# Altium PCB ov_ftdi.PcbDoc (part 3 of 3)
Units mm, origin at the board's own origin, x right, y up, seen from the top; angles counter-clockwise.
Board outline 70.64 x 125.22 mm, 4 copper layers (Top Layer, Ground, Power, Bottom Layer), stack 1.565 mm thick; 150 components, 161 nets, 670 pads, 245 vias.
Unrouted connection lines stored in the file: 2.
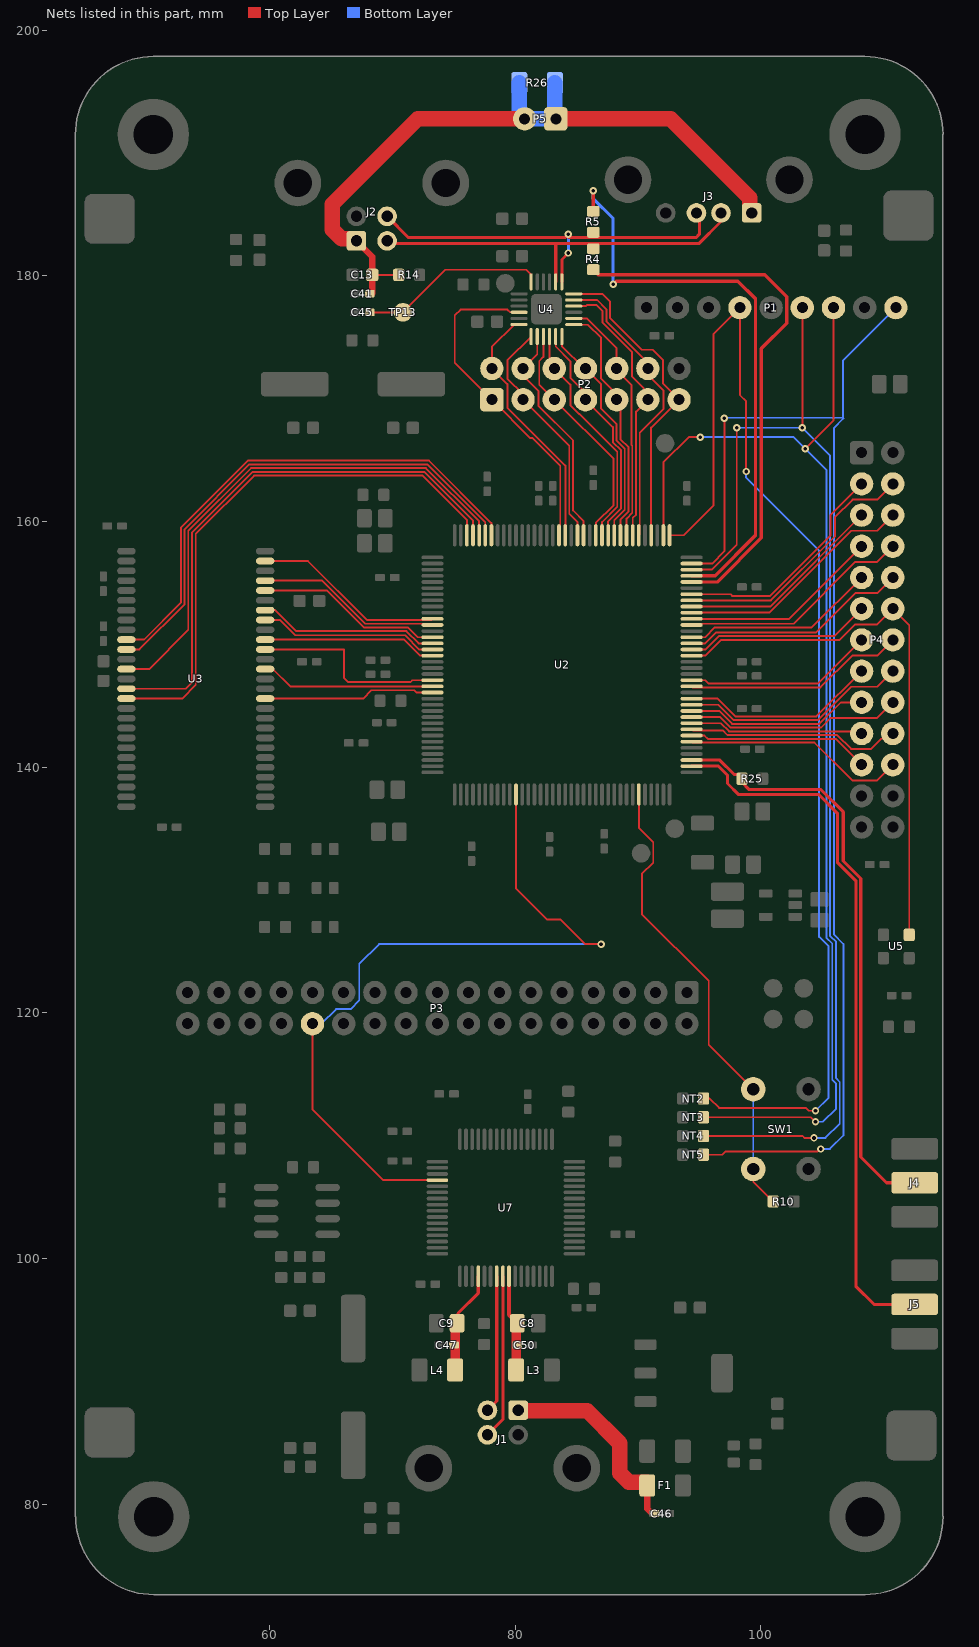
[diagram p5: the nets of this part, all layers, seen from the top]

## Via types
v1: diameter 0.6, hole 0.3, Top Layer to Bottom Layer, 245 vias

## Nets (pads, with @x,y where several pads share a name; then routed paths per layer and width w, separated by ;. In a path a pad name is that pad's centre, name@x,y a point inside that pad or via, vN(x,y) a via of type N, cw(c..) or ccw(c..) an arc to the next point about the centre after c; other vN are vias at no path point) (continued)
RAM_D5: U2.138 U3.10 | length 42.4
  Top Layer w0.152: U3.10@48.35,150.393 49.784,150.393 52.781,153.39 52.781,159.502 58.243,164.963 72.985,164.963 78.07,159.878 U2.138@78.07,158.886
RAM_D6: U2.139 U3.11 | length 42.1
  Top Layer w0.152: U3.11@48.35,149.593 49.415,149.593 53.086,153.264 53.086,159.375 58.369,164.658 72.859,164.658 77.57,159.947 U2.139@77.57,158.886
RAM_D7: U2.140 U3.13 | length 43.1
  Top Layer w0.152: U3.13@48.35,147.993 50.203,147.993 53.391,151.181 53.391,159.249 58.495,164.353 72.732,164.353 77.07,160.016 U2.140@77.07,158.886
RAM_D8: U2.22 U3.42 | length 14.2
  Top Layer w0.152: U3.42@59.65,147.993 60.287,147.993 61.694,146.586 U2.22@73.27,146.586
RAM_D9: U2.21 U3.44 | length 16.1
  Top Layer w0.152: U3.44@59.65,149.593 66.053,149.593 66.053,147.307 66.421,146.939 71.481,146.939 71.628,147.086 U2.21@73.27,147.086
RAM_D10: U2.17 U3.45 | length 14.2
  Top Layer w0.152: U3.45@59.65,150.393 70.968,150.393 72.275,149.086 U2.17@73.27,149.086
RAM_D11: U2.16 U3.47 | length 14.6
  Top Layer w0.152: U3.47@59.65,151.993 60.834,151.993 62.078,150.749 71.043,150.749 72.206,149.586 U2.16@73.27,149.586
RAM_D12: U2.15 U3.48 | length 14.7
  Top Layer w0.152: U3.48@59.65,152.793 60.465,152.793 62.179,151.079 71.144,151.079 72.137,150.086 U2.15@73.27,150.086
RAM_D13: U2.14 U3.50 | length 15.2
  Top Layer w0.152: U3.50@59.65,154.393 64.663,154.393 67.672,151.384 71.27,151.384 72.068,150.586 U2.14@73.27,150.586
RAM_D14: U2.12 U3.51 | length 15.1
  Top Layer w0.152: U3.51@59.65,155.193 64.294,155.193 67.798,151.689 73.167,151.689 U2.12@73.27,151.586
RAM_D15: U2.11 U3.53 | length 15.6
  Top Layer w0.152: U3.53@59.65,156.793 63.125,156.793 67.924,151.994 73.178,151.994 U2.11@73.27,152.086
RAM_DQMH: U2.23 U3.39 | length 14
  Top Layer w0.152: U3.39@59.65,145.593 67.615,145.593 68.293,146.271 71.788,146.271 71.973,146.086 U2.23@73.27,146.086
RAM_DQML: U2.141 U3.15 | length 45.5
  Top Layer w0.152: U3.15@48.35,146.393 53.175,146.393 53.696,146.914 53.696,159.123 58.621,164.049 72.606,164.049 76.57,160.085 U2.141@76.57,158.886
RAM_WE#: U2.142 U3.16 | length 45.2
  Top Layer w0.152: U3.16@48.35,145.593 52.883,145.593 54,146.71 54,158.997 58.748,163.744 72.48,163.744 76.07,160.154 U2.142@76.07,158.886
RDWR_B: P3.26 U2.47 U7.52 | length 63.6
  Top Layer w0.152: P3.26@63.5,119.126 63.5,112.168 69.278,106.39 U7.52@73.673,106.39 ; U2.47@80.07,137.786 80.07,130.115 82.575,127.61 83.688,127.61 85.694,125.603 v1@86.868,125.603
  Bottom Layer w0.152: P3.26@63.5,119.126 64.225,119.126 65.418,120.319 66.598,120.319 67.31,121.031 67.31,123.989 68.924,125.603 v1@86.868,125.603
  other v1: 86.995,125.603
SPARE0: P4.3 U2.102 | length 18.6
  Top Layer w0.152: U2.102@94.37,154.086 97.537,154.086 97.665,153.957 100.764,153.957 105.664,158.857 105.664,160.528 P4.3@108.204,163.068
SPARE1: P4.4 U2.101 | length 21.2
  Top Layer w0.152: U2.101@94.37,153.586 100.824,153.586 106.025,158.787 106.025,160.35 107.473,161.798 109.474,161.798 P4.4@110.744,163.068
SPARE2: P4.5 U2.100 | length 16.9
  Top Layer w0.152: U2.100@94.37,153.086 100.755,153.086 108.197,160.528 P4.5@108.204,160.528
SPARE3: P4.6 U2.99 | length 19.7
  Top Layer w0.152: U2.99@94.37,152.586 100.686,152.586 107.358,159.258 109.474,159.258 P4.6@110.744,160.528
SPARE4: P4.7 U2.98 | length 16.3
  Top Layer w0.152: U2.98@94.37,152.086 102.302,152.086 P4.7@108.204,157.988
SPARE5: P4.8 U2.97 | length 19
  Top Layer w0.152: U2.97@94.37,151.586 94.473,151.689 102.667,151.689 107.696,156.718 109.474,156.718 P4.8@110.744,157.988
SPARE6: P4.9 U2.95 | length 15.8
  Top Layer w0.152: U2.95@94.37,150.586 95.468,150.586 96.266,151.384 104.14,151.384 P4.9@108.204,155.448
SPARE7: P4.10 U2.94 | length 18.6
  Top Layer w0.152: U2.94@94.37,150.086 95.476,150.086 96.368,150.978 104.496,150.978 107.696,154.178 109.474,154.178 P4.10@110.744,155.448
SPARE8: P4.11 U2.93 | length 15.2
  Top Layer w0.152: U2.93@94.37,149.586 95.484,149.586 96.571,150.673 105.969,150.673 P4.11@108.204,152.908
SPARE9: P4.12 U2.92 U5.3 | length 45.1
  Top Layer w0.152: U2.92@94.37,149.086 95.492,149.086 96.774,150.368 106.426,150.368 107.696,151.638 109.474,151.638 P4.12@110.744,152.908 112.082,151.57 U5.3@112.082,126.36
SPARE10: P4.13 U2.88 | length 15.4
  Top Layer w0.152: U2.88@94.37,147.086 95.484,147.086 95.758,146.812 104.648,146.812 P4.13@108.204,150.368
SPARE11: P4.14 U2.87 | length 18
  Top Layer w0.152: U2.87@94.37,146.586 94.449,146.507 104.851,146.507 107.442,149.098 109.474,149.098 P4.14@110.744,150.368
SPARE12: P4.15 U2.85 | length 16
  Top Layer w0.152: U2.85@94.37,145.586 96.476,145.586 97.917,144.145 104.521,144.145 P4.15@108.204,147.828
SPARE13: P4.16 U2.84 | length 18.5
  Top Layer w0.152: U2.84@94.37,145.086 96.545,145.086 97.791,143.84 104.647,143.84 107.365,146.558 109.474,146.558 P4.16@110.744,147.828
SPARE14: P4.17 U2.83 | length 15
  Top Layer w0.152: U2.83@94.37,144.586 96.614,144.586 97.664,143.535 104.774,143.535 106.526,145.288 P4.17@108.204,145.288
SPARE15: P4.18 U2.82 | length 17.6
  Top Layer w0.152: U2.82@94.37,144.086 96.683,144.086 97.538,143.231 104.9,143.231 105.669,144 109.456,144 P4.18@110.744,145.288
SPARE16: P4.19 U2.81 | length 14.2
  Top Layer w0.152: U2.81@94.37,143.586 96.752,143.586 97.412,142.926 108.026,142.926 P4.19@108.204,142.748
SPARE17: P4.20 U2.80 | length 17.5
  Top Layer w0.152: U2.80@94.37,143.086 94.454,143.002 96.905,143.002 97.286,142.621 106.222,142.621 107.343,141.5 108.988,141.5 109.809,142.321 109.844,142.321 110.271,142.748 P4.20@110.744,142.748
SPARE18: P4.21 U2.79 | length 14.8
  Top Layer w0.152: U2.79@94.37,142.586 95.412,142.586 95.682,142.316 106.096,142.316 P4.21@108.204,140.208
SPARE19: P4.22 U2.78 | length 18.2
  Top Layer w0.152: U2.78@94.37,142.086 94.445,142.011 104.369,142.011 107.442,138.938 109.474,138.938 P4.22@110.744,140.208
SW1: R10.1 SW1.1 SW1.2 U2.67 | length 38.4
  Top Layer w0.152: U2.67@90.07,137.786 90.07,135.073 91.241,133.903 91.241,132.241 90.322,131.322 90.322,128.053 95.758,122.617 95.758,117.42 SW1.1@99.386,113.792 ; SW1.2@99.386,107.292 99.386,106.266 R10.1@101.004,104.648
  Bottom Layer w0.152: SW1.2@99.386,107.292 SW1.1@99.386,113.792
TARGET1ULPI_CLK: P2.4 U2.123 U4.2 | length 18.7
  Top Layer w0.152: P2.4@80.645,172.466 81.8,173.621 U4.2@81.8,175.067 ; P2.4@80.721,172.466 80.721,171.807 81.894,170.634 81.894,169.439 84.709,166.624 84.709,160.909 85.57,160.048 U2.123@85.57,158.886
TARGET1ULPI_D0: P2.6 U2.120 U4.4 | length 19
  Top Layer w0.152: U4.4@82.8,175.067 82.8,172.851 84.501,171.15 84.501,169.484 85.237,168.747 85.253,168.747 88.316,165.684 88.316,161.208 87.07,159.962 U2.120@87.07,158.886
TARGET1ULPI_D1: P2.7 U2.119 U4.5 | length 18.8
  Top Layer w0.152: U4.5@83.3,175.067 83.3,174.256 84.498,173.058 84.498,171.727 85.391,170.834 85.391,170.26 87.96,167.691 87.96,166.471 88.621,165.81 88.621,161.081 87.57,160.031 U2.119@87.57,158.886
TARGET1ULPI_D2: P2.8 U2.118 U4.6 | length 18.6
  Top Layer w0.152: U4.6@83.8,175.067 83.8,174.277 P2.8@85.611,172.466 ; P2.8@85.725,172.466 86.995,171.196 86.995,169.205 88.265,167.935 88.265,166.597 88.925,165.937 88.925,160.955 88.07,160.1 U2.118@88.07,158.886
TARGET1ULPI_D3: P2.9 U2.117 U4.7 | length 19.9
  Top Layer w0.152: U4.7@84.775,176.022 85.929,176.022 86.995,174.956 86.995,171.627 88.265,170.357 P2.9@88.265,169.926 88.57,169.621 88.57,166.723 89.23,166.063 89.23,160.829 88.57,160.169 U2.117@88.57,158.886
TARGET1ULPI_D4: P2.10 U2.116 U4.8 | length 20.4
  Top Layer w0.152: U4.8@84.775,176.53 85.852,176.53 88.265,174.117 88.265,172.329 89.475,171.119 89.475,166.249 89.535,166.189 89.535,160.703 89.07,160.238 U2.116@89.07,158.886
TARGET1ULPI_D5: P2.11 U2.115 U4.10 | length 22.9
  Top Layer w0.152: U4.10@84.775,177.542 85.746,177.542 85.852,177.648 86.613,177.648 87.122,177.138 87.122,176.199 89.525,173.796 89.525,171.8 90.471,170.854 90.471,170.26 P2.11@90.805,169.926 89.84,168.961 89.84,160.576 89.57,160.307 U2.115@89.57,158.886
TARGET1ULPI_D6: P2.12 U2.114 U4.11 | length 24.1
  Top Layer w0.152: U4.11@84.775,178.042 86.677,178.042 87.427,177.292 87.427,176.325 90.805,172.947 P2.12@90.805,172.466 90.805,171.958 92.075,170.688 92.075,169.164 90.145,167.234 90.145,158.961 U2.114@90.07,158.886
TARGET1ULPI_D7: P2.13 U2.112 U4.12 | length 26
  Top Layer w0.152: U4.12@84.775,178.542 87.088,178.542 87.732,177.899 87.732,176.555 90.297,173.99 91.21,173.99 92.05,173.15 92.05,171.221 P2.13@93.345,169.926 91.07,167.651 U2.112@91.07,158.886
TARGET1ULPI_DIR: P2.3 U2.124 U4.1 | length 19.3
  Top Layer w0.152: U4.1@81.3,175.067 79.375,173.142 79.375,171.627 80.645,170.357 P2.3@80.645,169.926 84.404,166.167 84.404,160.651 85.07,159.985 U2.124@85.07,158.886
TARGET1ULPI_NXT: P2.5 U2.121 U4.3 | length 19.4
  Top Layer w0.152: U4.3@82.3,175.067 82.3,173.41 81.966,173.076 81.966,171.145 P2.5@83.185,169.926 88.011,165.1 88.011,161.334 86.57,159.893 U2.121@86.57,158.886
TARGET1ULPI_RST: P2.1 U2.127 U4.22 | length 27.2
  Top Layer w0.152: P2.1@78.105,169.926 75.082,172.949 75.082,176.783 75.558,177.259 79.373,177.259 79.589,177.042 U4.22@80.325,177.042 ; P2.1@78.168,169.989 78.168,169.862 81.229,166.802 81.417,166.802 83.668,164.551 83.668,158.984 U2.127@83.57,158.886
TARGET1ULPI_STP: P2.2 U2.126 U4.24 | length 20.8
  Top Layer w0.152: U4.24@80.325,176.042 79.913,176.042 78.105,174.234 P2.2@78.105,172.466 79.375,171.196 79.375,169.275 84.091,164.559 U2.126@84.091,158.907
TARGETD_N: J2.2 J3.2 R4.1 U4.14 | length 31.8
  Top Layer w0.254: J2.2@69.576,182.856 69.806,182.626 83.3,182.626 ; U4.14@83.3,179.517 83.3,182.626 ; J3.2@96.758,185.13 96.758,184.432 94.952,182.626 83.3,182.626
TARGETD_P: J2.3 J3.3 R5.1 U4.13 | length 32.3
  Top Layer w0.254: J2.3@69.576,184.856 71.298,183.134 84.074,183.134 v1(84.328,183.388) ; U4.13@83.808,179.529 83.808,181.344 v1(84.328,181.864) ; v1@84.328,183.134 94.742,183.134 94.996,183.388 94.996,184.892 J3.3@94.758,185.13
  Bottom Layer w0.254: v1(84.328,181.864) v1(84.328,183.388)
TARGETDTAP_N: R4.2 U2.104 | length 44.3
  Top Layer w0.229: R4.2@86.36,180.506 R4.2@86.78,180.086 ; 96.412,155.086 96.429,155.103 96.477,155.103
  Top Layer w0.279: R4.2@86.78,180.086 100.33,180.086 102.108,178.308 102.108,176.149 100.051,174.092 100.051,158.677 96.477,155.103 ; U2.104@94.37,155.086 96.412,155.086
TARGETDTAP_P: R5.2 U2.105 | length 48.1
  Top Layer w0.229: v1(87.975,179.324) 88.229,179.578
  Top Layer w0.254: R5.2@86.36,185.254 v1(86.36,186.944)
  Top Layer w0.279: 88.229,179.578 98.124,179.578 99.568,178.134 99.568,158.877 96.277,155.586 U2.105@94.37,155.586
  Bottom Layer w0.254: v1(86.36,186.944) 86.36,186.288 87.975,184.673 v1(87.975,179.324)
TARGETID: C45.1 TP13.1 U4.18 | length 14.7
  Top Layer w0.152: C45.1@68.364,177.038 TP13.1@70.866,177.038 74.328,180.5 80.892,180.5 81.3,180.092 U4.18@81.3,179.929
TARGETVBUS: C13.2 C41.2 J2.1 J3.1 P5.1 P5.2 R14.2 R26.1 R26.2 | length 58.3
  Top Layer w0.152: C13.2@68.364,180.086 R14.2@70.524,180.086
  Top Layer w0.508: J2.1@67.076,182.856 68.364,181.568 C13.2@68.364,180.086 C41.2@68.364,178.562
  Top Layer w1.27: J2.1@67.076,182.856 66.911,183.021 65.869,183.021 65.125,183.765 65.125,185.85 72.061,192.786 P5.2@80.772,192.786 ; P5.1@83.312,192.786 92.664,192.786 99.093,186.357 99.093,185.295 J3.1@99.258,185.13
  Bottom Layer w1.27: R26.1@80.338,195.707 80.338,193.22 P5.2@80.772,192.786 P5.1@83.312,192.786 83.238,192.86 R26.2@83.238,195.707
TCK: NT2.2 P1.4 U2.109 | length 99.9
  Top Layer w0.152: U2.109@92.57,158.886 93.735,158.886 96.139,161.29 96.139,175.26 P1.4@98.298,177.419 98.298,170.307 98.806,169.799 v1(98.806,164.084) ; NT2.2@95.338,113.03 95.846,113.03 96.608,112.268 103.668,112.268 103.901,112.035 v1(104.45,112.035)
  Bottom Layer w0.152: v1(98.806,164.084) 98.806,163.576 104.75,157.632 104.75,126.186 105.512,125.424 105.512,113.096 v1(104.45,112.035)
TDI: NT3.2 P1.7 U2.110 | length 97.3
  Top Layer w0.152: U2.110@92.07,158.886 92.07,164.82 94.128,166.878 v1(95.059,166.878) ; NT3.2@95.338,111.506 104.071,111.506 104.433,111.144 v1(104.456,111.144) ; v1(103.614,165.93) 105.918,168.235 P1.7@105.918,177.419
  Bottom Layer w0.152: v1(95.059,166.878) 102.666,166.878 105.334,164.21 105.334,126.136 105.816,125.653 105.816,114.555 106.121,114.251 106.121,112.217 105.048,111.144 v1(104.456,111.144)
TDO: NT4.2 P1.6 U2.106 | length 98.7
  Top Layer w0.152: U2.106@94.37,156.086 96.015,156.086 98.044,158.115 v1(98.044,167.64) ; NT4.2@95.338,109.982 103.394,109.982 103.551,109.825 v1(104.325,109.825) ; v1(103.378,167.64) P1.6@103.378,177.419
  Bottom Layer w0.152: v1(98.044,167.64) v1(103.378,167.64) 105.639,165.379 105.639,126.262 106.121,125.779 106.121,114.682 106.426,114.377 106.426,110.998 105.253,109.825 v1(104.325,109.825)
TMS: NT5.2 P1.9 U2.107 | length 105.4
  Top Layer w0.152: U2.107@94.37,156.586 96.032,156.586 97.028,157.582 v1(97.028,168.402) ; NT5.2@95.338,108.458 96.862,108.458 97.116,108.712 104.612,108.712 104.828,108.928 v1(104.888,108.928)
  Bottom Layer w0.152: v1(97.028,168.402) 97.079,168.453 106.68,168.453 106.68,173.101 P1.9@110.998,177.419 ; v1(104.888,108.928) 105.626,108.928 106.731,110.033 106.731,125.601 105.943,126.388 105.943,167.615 106.731,168.402
TRIG_IN: J4.1 R25.1 U2.75 | length 48.2
  Top Layer w0.254: U2.75@94.37,140.586 96.664,140.586 97.834,139.416 98.163,139.416 98.464,139.115 98.464,138.757 99.045,138.176 104.902,138.176 106.705,136.373 106.705,132.375 108.14,130.941 108.14,108.268 110.236,106.172 J4.1@112.522,106.172
TRIG_OUT: J5.1 U2.74 | length 58.4
  Top Layer w0.254: U2.74@94.37,140.086 94.39,140.106 96.54,140.106 97.282,139.364 97.282,138.684 98.196,137.77 104.734,137.77 106.233,136.27 106.233,132.273 107.733,130.773 107.733,97.753 109.22,96.266 J5.1@112.522,96.266
USB_N: J1.2 U7.7 | length 11.2
  Top Layer w0.254: J1.2@77.744,87.654 78.498,88.408 U7.7@78.498,98.565
USB_P: J1.3 U7.8 | length 13.4
  Top Layer w0.254: J1.3@77.744,85.654 78.998,86.908 U7.8@78.998,98.565
VPHY: C9.2 C47.2 L4.2 U7.4 | length 9
  Top Layer w0.254: L4.2@75.349,90.932 75.349,90.335 L4.2@75.364,90.32 ; C9.2@75.349,94.742 75.349,95.542 76.998,97.191 U7.4@76.998,98.565
  Top Layer w0.762: L4.2@75.11,90.932 75.11,92.964 75.11,94.58 C9.2@75.272,94.742
VPLL: C8.2 C50.2 L3.2 U7.9 | length 8
  Top Layer w0.305: U7.9@79.498,98.565 79.498,95.42 C8.2@80.176,94.742
  Top Layer w0.762: L3.2@80.084,90.932 80.084,92.964 80.084,94.65 C8.2@80.176,94.742
VUSB: C46.2 F1.1 J1.1 | length 17.1
  Top Layer w0.508: F1.1@90.752,81.534 90.752,79.644 C46.2@91.148,79.248
  Top Layer w1.27: J1.1@80.244,87.654 80.385,87.654 80.409,87.63 85.852,87.63 88.519,84.963 88.519,82.543 89.263,81.799 90.737,81.799 90.752,81.784 F1.1@90.752,81.534
pads on no net: H1.1@50.546,191.516 H2.1@108.483,191.516 H3.1@108.483,78.994 H4.1@50.571,78.994 J1.5 J2.6 J3.5 P1.3 P1.5 P1.8 U3.40 U7.36 U7.60 U8.7

## Polygon pours and split planes (outlines as drawn)
GND on Top Layer "Top ground" (solid, remove dead copper, pour order 7): 44.196,72.644 44.196,197.866 114.554,197.866 114.554,72.644
+1.2V on Top Layer "FPGA VccInt (1.2v)" (solid, remove dead copper, pour order 5): 74.016,158.403 74.196,158.215 96.012,158.215 96.012,135.424 95.729,135.128 74.186,135.128
+1.8V on Top Layer "FTDI Vcc18 (1.8v)" (solid, remove dead copper, pour order 6): 74.168,108.966 84.074,108.966 84.074,99.314 83.82,99.06 74.168,99.06
+3.3V on Top Layer "top 3.3v supply" (solid, remove dead copper, pour order 2): 88.519,88.519 98.806,88.519 98.806,94.996 88.87,94.996 88.519,94.695
NetC1_2 on Top Layer "top c1_2" (solid, remove dead copper, pour order 3): 99.822,129.54 99.314,129.032 98.552,129.032 93.98,129.032 93.98,132.334 93.98,132.588 94.234,132.842 98.298,132.842 98.298,131.318 98.806,130.81 98.806,130.556 99.568,130.556 100.076,130.048
GND on Bottom Layer "bottom ground" (solid, remove dead copper, pour order 8): 44.196,197.612 114.554,197.612 114.554,72.644 44.196,72.644
GND on Ground (split plane): 108.811,197.349 109.137,197.321 109.462,197.275 109.783,197.211 110.1,197.129 110.412,197.03 110.719,196.913 111.018,196.779 111.309,196.629 111.591,196.462 111.863,196.28 112.125,196.083 112.376,195.872 112.614,195.647 112.839,195.409 113.05,195.158 113.247,194.896 113.429,194.624 113.596,194.342 113.746,194.051 113.88,193.752 113.997,193.445 114.096,193.133 114.178,192.816 114.242,192.495 114.288,192.17 114.316,191.844 114.321,191.66 114.307,191.616 114.298,191.516 114.298,79.019 114.307,78.919 114.321,78.873 114.316,78.666 114.288,78.34 114.242,78.015 114.178,77.694 114.096,77.377 113.997,77.065 113.88,76.758 113.746,76.459 113.596,76.168 113.429,75.886 113.247,75.614 113.05,75.352 112.839,75.101 112.614,74.863 112.376,74.638 112.125,74.427 111.863,74.23 111.591,74.048 111.309,73.881 111.018,73.731 110.719,73.597 110.412,73.48 110.1,73.381 109.783,73.299 109.462,73.235 109.137,73.189 108.811,73.161 108.501,73.153 108.483,73.154 50.596,73.154 50.574,73.152 50.571,73.152 50.243,73.161 49.917,73.189 49.592,73.235 49.271,73.299 48.954,73.381 48.642,73.48 48.335,73.597 48.036,73.731 47.745,73.881 47.463,74.048 47.191,74.23 46.929,74.427 46.678,74.638 46.44,74.863 46.215,75.101 46.004,75.352 45.807,75.614 45.625,75.886 45.458,76.168 45.308,76.459 45.174,76.758 45.057,77.065 44.958,77.377 44.876,77.694 44.812,78.015 44.766,78.34 44.738,78.666 44.729,78.994 44.731,78.994 44.722,79.094 44.706,79.144 44.706,191.491 44.704,191.513 44.704,191.516 44.713,191.844 44.741,192.17 44.787,192.495 44.851,192.816 44.933,193.133 45.032,193.445 45.149,193.752 45.283,194.051 45.433,194.342 45.6,194.624 45.782,194.896 45.979,195.158 46.19,195.409 46.415,195.647 46.653,195.872 46.904,196.083 47.166,196.28 47.438,196.462 47.72,196.629 48.011,196.779 48.31,196.913 48.617,197.03 48.929,197.129 49.246,197.211 49.567,197.275 49.892,197.321 50.218,197.349 50.528,197.357 50.546,197.356 108.458,197.356 108.48,197.358 108.483,197.358
+3.3V on Power (split plane): 108.811,197.349 109.137,197.321 109.462,197.275 109.783,197.211 110.1,197.129 110.412,197.03 110.719,196.913 111.018,196.779 111.309,196.629 111.591,196.462 111.863,196.28 112.125,196.083 112.376,195.872 112.614,195.647 112.839,195.409 113.05,195.158 113.247,194.896 113.429,194.624 113.596,194.342 113.746,194.051 113.88,193.752 113.997,193.445 114.096,193.133 114.178,192.816 114.242,192.495 114.288,192.17 114.316,191.844 114.321,191.66 114.307,191.616 114.298,191.516 114.298,79.019 114.307,78.919 114.321,78.873 114.316,78.666 114.288,78.34 114.242,78.015 114.178,77.694 114.096,77.377 113.997,77.065 113.88,76.758 113.746,76.459 113.596,76.168 113.429,75.886 113.247,75.614 113.05,75.352 112.839,75.101 112.614,74.863 112.376,74.638 112.125,74.427 111.863,74.23 111.591,74.048 111.309,73.881 111.018,73.731 110.719,73.597 110.412,73.48 110.1,73.381 109.783,73.299 109.462,73.235 109.137,73.189 108.811,73.161 108.501,73.153 108.483,73.154 50.596,73.154 50.574,73.152 50.571,73.152 50.243,73.161 49.917,73.189 49.592,73.235 49.271,73.299 48.954,73.381 48.642,73.48 48.335,73.597 48.036,73.731 47.745,73.881 47.463,74.048 47.191,74.23 46.929,74.427 46.678,74.638 46.44,74.863 46.215,75.101 46.004,75.352 45.807,75.614 45.625,75.886 45.458,76.168 45.308,76.459 45.174,76.758 45.057,77.065 44.958,77.377 44.876,77.694 44.812,78.015 44.766,78.34 44.738,78.666 44.729,78.994 44.731,78.994 44.722,79.094 44.706,79.144 44.706,191.491 44.704,191.513 44.704,191.516 44.713,191.844 44.741,192.17 44.787,192.495 44.851,192.816 44.933,193.133 45.032,193.445 45.149,193.752 45.283,194.051 45.433,194.342 45.6,194.624 45.782,194.896 45.979,195.158 46.19,195.409 46.415,195.647 46.653,195.872 46.904,196.083 47.166,196.28 47.438,196.462 47.72,196.629 48.011,196.779 48.31,196.913 48.617,197.03 48.929,197.129 49.246,197.211 49.567,197.275 49.892,197.321 50.218,197.349 50.528,197.357 50.546,197.356 108.458,197.356 108.48,197.358 108.483,197.358

## Keep-outs
Keep-Out Layer:
  lines w0.254: 44.196,78.994 44.196,191.491 cw(c50.546,191.516) 50.546,197.866 108.458,197.866 cw(c108.483,191.516) 114.833,191.516 ; 44.221,78.994 ccw(c50.571,78.994) 50.596,72.644 108.483,72.644 ccw(c108.483,78.994) 114.833,79.019 ; 114.808,79.019 114.808,191.516

## Other copper
Top Layer:
  pour cut-out: 54.813,186.461 54.813,196.621 57.353,196.621 57.353,186.461
  pour cut-out: 95.25,128.778 101.473,128.778 101.512,128.817 101.6,128.729 101.6,123.19 95.25,123.19
  pour cut-out: 96.774,130.556 102.997,130.556 103.036,130.595 103.124,130.507 103.124,124.968 96.774,124.968
  region net NetC1_2: 100.965,129.032 94.107,129.032 94.107,132.715 93.98,132.842 98.298,132.842 98.298,131.191 99.06,130.429 100.965,130.429
  text "1" at 56.845,187.223 h2.79 r90
Bottom Layer:
  pour cut-out: 77.47,195.453 85.979,195.453 85.979,187.833 85.852,187.706 77.47,187.706
  pour cut-out: 54.813,186.461 54.813,189.001 57.353,189.001 57.353,186.461
  pour cut-out: 54.856,186.461 54.856,196.621 57.396,196.621 57.396,186.461
  pour cut-out: 95.25,128.778 101.6,128.778 101.6,123.19 95.25,123.19
  text "4" at 56.845,194.843 h2.79 r90
Power (plane layer: these items are gaps in the copper):
  region: 54.864,191.795 57.378,191.795 57.404,191.769 57.404,186.436 54.864,186.436
  region: 54.864,193.777 54.864,196.596 57.404,196.596 57.378,196.57 57.378,193.777
  lines w1.524: 82.042,177.292 83.058,177.292
  text "3" at 56.845,192.303 h2.79 r90
Ground (plane layer: these items are gaps in the copper):
  region: 54.856,190.779 54.856,196.621 57.396,196.621 57.396,190.779
  region: 54.856,186.461 54.856,189.509 57.396,189.509 57.396,186.461
  region: 54.813,193.573 54.813,196.621 57.353,196.621 57.353,193.573
  region: 95.25,128.778 101.6,128.778 101.6,123.19 95.25,123.19
  text "2" at 56.845,189.763 h2.79 r90

## Silkscreen, mask and mechanical layers (free items; w line width, h text height)
Top Overlay:
  lines w0.254: 63.5,123.3 63.5,124.1 ; 70.895,175.418 70.895,175.926 ; 77.4,180.5 78.15,180.5 78.408,180.242 ; 89,104 89,114.554 96.774,114.554 96.774,104 89,104 ; 98,116.5 106.5,116.5 106.5,124.7 98,124.7 98,116.5
  text "to device" at 104,191 h2 r90
  text "target current" at 77.032,189.992 h2
  text "measurement" at 77.1,188.6 h2
  text "to target host" at 59.25,188 h2 r90
  text "d+" at 93.726,182.58 h2
  text "d-" at 96.52,182.58 h2
  text "rbias" at 73.85,180.275 h2
  text "+3.3v" at 91.186,179.07 h2 r90
  text "gnd" at 93.472,179.07 h2 r90
  text "tck" at 98.552,179.07 h2 r90
  text "tdo" at 103.632,179.07 h2 r90
  text "tdi" at 106.172,179.07 h2 r90
  text "tms" at 111.252,179.07 h2 r90
  text "cut links first!" at 104.648,174.498 h2
  text "stp" at 75.7,174.4 h2
  text "targetID" at 69.3,174.3 h2
  text "clk" at 78.105,174.234 h2
  text "d0" at 86,174.1 h2 r90
  text "d2" at 87.4,174.1 h2 r90
  text "d4" at 88.8,174.1 h2 r90
  text "d6" at 90.2,174.1 h2 r90
  text "d7" at 94.045,166.67 h2 r90
  text "d1" at 86.106,166.604 h2 r90
  text "d3" at 88.646,166.599 h2 r90
  text "d5" at 91.186,166.604 h2 r90
  text "rst" at 78.486,166.519 h2 r90
  text "dir" at 81.026,166.398 h2 r90
  text "nxt" at 83.566,166.124 h2 r90
  text "gnd" at 112.372,165.354 h2
  text "gnd" at 104.025,165.227 h2
  text "s0" at 105.055,162.814 h2
  text "s1" at 112.372,162.814 h2
  text "s2" at 105.075,160.274 h2
  text "s3" at 112.372,160.274 h2
  text "s4" at 105.044,157.734 h2
  text "s5" at 112.372,157.734 h2
  text "s7" at 112.372,155.194 h2
  text "s6" at 105.06,154.94 h2
  text "s9" at 112.372,152.654 h2
  text "s8" at 105.06,152.4 h2
  text "s11" at 112.372,150.114 h2
  text "s10" at 104.226,149.86 h2
  text "s12" at 104.246,147.574 h2
  text "s13" at 112.372,147.574 h2
  text "s15" at 112.372,145.034 h2
  text "s14" at 104.215,144.78 h2
  text "s17" at 112.372,142.494 h2
  text "s16" at 104.23,142.24 h2
  text "s18" at 104.23,139.7 h2
  text "s19" at 112.372,139.7 h2
  text "5v" at 112.372,137.414 h2
  text "1v2" at 104.185,137.398 h2
  text "3v3" at 104.14,134.62 h2
  text "3v3" at 112.372,134.62 h2
  text "csi_b" at 61.5,124.79 h2
  text "gnd" at 53.594,123.444 h2 r90
  text "m0" at 56.134,123.444 h2 r90
  text "bc4" at 58.928,123.444 h2 r90
  text "bd6" at 66.548,123.444 h2 r90
  text "bd4" at 68.834,123.444 h2 r90
  text "tdo" at 71.374,123.444 h2 r90
  text "tck" at 73.914,123.444 h2 r90
  text "ac6" at 76.454,123.444 h2 r90
  text "ac4" at 78.994,123.444 h2 r90
  text "ac2" at 81.788,123.444 h2 r90
  text "ac0" at 84.074,123.444 h2 r90
  text "d6" at 86.614,123.444 h2 r90
  text "d2" at 91.694,123.444 h2 r90
  text "d0" at 94.488,123.444 h2 r90
  text "done" at 59.3,123.355 h2
  text "d4" at 89.57,123.25 h2 r90
  text "d5" at 89.154,115.762 h2 r90
  text "d1" at 94.488,115.762 h2 r90
  text "d7" at 86.614,115.753 h2 r90
  text "d3" at 91.694,115.758 h2 r90
  text "tdi" at 74.168,115.589 h2 r90
  text "m1" at 56.134,115.35 h2 r90
  text "ac3" at 81.767,115.332 h2 r90
  text "ac7" at 76.708,115.135 h2 r90
  text "gnd" at 53.594,114.925 h2 r90
  text "bd5" at 69.088,114.926 h2 r90
  text "bd7" at 66.548,114.916 h2 r90
  text "tms" at 71.374,114.852 h2 r90
  text "cclk" at 84.074,114.858 h2 r90
  text "prog" at 61.214,114.353 h2 r90
  text "init_b" at 58.928,113.54 h2 r90
  text "clkout" at 78.994,113.241 h2 r90
  text "rdwr_b" at 63.754,112.542 h2 r90
  text "tck" at 89.85,112.5 h2
  text "tdi" at 89.965,111.049 h2
  text "tdo" at 89.6,109.5 h2
  text "tms" at 89.35,108 h2
  text "cut for" at 91,106 h2
  text "trig in" at 109.22,104.902 h2 r90
  text "ext JTAG" at 90.25,104.5 h2
  text "dat" at 66.3,104.275 h2
  text "clk" at 66.3,102.725 h2
  text "cs" at 66.3,101.5 h2
  text "trig out" at 109.22,94.488 h2 r90
  text "power" at 96.425,82.2 h2 r90
  text "OpenVizsla v3.2" at 85.598,75.946 h3.56
  text "to analysis" at 65.25,75 h2
  text "(c) 2013,2014 bushing" at 88.8,74.3 h2
  text "host" at 67.25,73.5 h2
Bottom Overlay:
  lines w0.254: 76.7,187.6 76.7,194.25 86.875,194.25 86.875,187.6 76.7,187.6
  text "cut trace for" at 85.865,190.625 h2
  text "target current" at 86.461,189.341 h2
  text "measurement" at 86.425,187.955 h2
  text "gnd" at 91.948,186.686 h2 r270
  text "D+" at 94.234,186.686 h2 r270
  text "D-" at 96.52,186.686 h2 r270
  text "Vbus" at 98.806,186.685 h2 r270
  text "gnd" at 65.531,184.404 h2
  text "D+" at 72.64,184.404 h2
  text "Vbus" at 65.532,182.372 h2
  text "D-" at 72.32,182.372 h2
  text "+3.3v" at 90.174,178.82 h2 r270
  text "gnd" at 92.714,178.82 h2 r270
  text "tck" at 97.794,178.82 h2 r270
  text "tdo" at 102.874,178.82 h2 r270
  text "tdi" at 105.414,178.82 h2 r270
  text "tms" at 110.494,178.82 h2 r270
  text "cut links first!" at 112.25,174.5 h2
  text "stp" at 77.724,173.74 h2 r270
  text "clk" at 80.264,173.74 h2 r270
  text "d0" at 82.804,173.74 h2 r270
  text "d2" at 85.344,173.74 h2 r270
  text "d4" at 87.884,173.74 h2 r270
  text "d6" at 90.424,173.74 h2 r270
  text "gnd" at 92.964,173.74 h2 r270
  text "d1" at 85.344,166.862 h2 r270
  text "d3" at 87.884,166.857 h2 r270
  text "d5" at 90.424,166.862 h2 r270
  text "d7" at 92.964,166.853 h2 r270
  text "rst" at 77.724,166.777 h2 r270
  text "dir" at 80.264,166.656 h2 r270
  text "nxt" at 82.804,166.382 h2 r270
  text "gnd" at 106.791,165.354 h2
  text "gnd" at 114.323,165.354 h2
  text "s0" at 106.791,162.814 h2
  text "s1" at 113.262,162.814 h2
  text "s2" at 106.791,160.274 h2
  text "s3" at 113.267,160.274 h2
  text "s4" at 106.791,157.734 h2
  text "s5" at 113.262,157.734 h2
  text "s7" at 113.271,155.194 h2
  text "s6" at 106.791,154.94 h2
  text "s9" at 113.274,152.654 h2
  text "s8" at 106.791,152.4 h2
  text "s10" at 106.791,149.86 h2
  text "s11" at 114.091,149.86 h2
  text "s13" at 114.096,147.574 h2
  text "s12" at 106.791,147.32 h2
  text "s15" at 114.091,145.034 h2
  text "s14" at 106.791,144.78 h2
  text "s17" at 114.101,142.494 h2
  text "s16" at 106.791,142.24 h2
  text "s18" at 106.791,139.7 h2
  text "s19" at 114.103,139.7 h2
  text "5v" at 113.422,137.43 h2
  text "1v2" at 106.791,137.414 h2
  text "3v3" at 106.791,134.62 h2
  text "3v3" at 114.208,134.62 h2
  text "gnd" at 52.836,123.194 h2 r270
  text "m0" at 55.376,123.194 h2 r270
  text "bc4" at 57.916,123.194 h2 r270
  text "done" at 60.456,123.194 h2 r270
  text "csi_b" at 62.996,123.194 h2 r270
  text "bd6" at 65.536,123.194 h2 r270
  text "bd4" at 67.822,123.194 h2 r270
  text "tdi" at 70.362,123.194 h2 r270
  text "tck" at 72.902,123.194 h2 r270
  text "ac6" at 75.696,123.194 h2 r270
  text "ac4" at 78.236,123.194 h2 r270
  text "ac2" at 80.776,123.194 h2 r270
  text "ac0" at 83.316,123.194 h2 r270
  text "d6" at 85.602,123.194 h2 r270
  text "d0" at 93.476,123.194 h2 r270
  text "d2" at 90.975,123.175 h2 r270
  text "d4" at 88.5,123.15 h2 r270
  text "d7" at 85.602,116.003 h2 r270
  text "d5" at 88.142,116.012 h2 r270
  text "d3" at 90.682,116.008 h2 r270
  text "d1" at 93.476,116.012 h2 r270
  text "tdi" at 73.156,115.839 h2 r270
  text "m1" at 55.122,115.6 h2 r270
  text "ac3" at 80.726,115.586 h2 r270
  text "ac7" at 75.696,115.385 h2 r270
  text "gnd" at 52.582,115.175 h2 r270
  text "bd7" at 65.536,115.166 h2 r270
  text "bd5" at 68.076,115.176 h2 r270
  text "tms" at 70.616,115.102 h2 r270
  text "cclk" at 83.316,115.108 h2 r270
  text "prog" at 60.456,114.603 h2 r270
  text "clkout" at 78.204,113.858 h2 r270
  text "init_b" at 57.916,113.79 h2 r270
  text "rdwr_b" at 62.996,112.792 h2 r270
  text "Vusb" at 85.078,87.376 h2
  text "D-" at 76.446,87.126 h2
  text "gnd" at 84.189,85.344 h2
  text "D+" at 76.446,85.094 h2
Top Solder:
  region: 79.629,178.562 81.026,178.562 81.026,176.022 79.629,176.022
  region: 81.28,180.213 83.82,180.213 83.82,178.816 81.28,178.816
  region: 84.074,178.562 85.471,178.562 85.471,176.022 84.074,176.022
  region: 81.28,175.768 83.82,175.768 83.82,174.371 81.28,174.371
  lines w1.524: 48.336,136.881 48.362,157.328 ; 59.614,137.008 59.639,157.455
Mechanical 2:
  lines w0.254: 37.846,78.841 ccw(c50.393,78.841) 50.393,66.294 108.587,66.294 ccw(c108.587,78.865) 121.158,78.865 121.158,191.669 ccw(c108.611,191.669) 108.611,204.216 50.417,204.216 ccw(c50.417,191.645) 37.846,191.645 37.846,78.841
Mechanical 10:
  lines w0.381: 133.733,103.251 144.145,103.251 167.761,103.251 189.599,103.251 206.104,103.251 220.579,103.251 232.514,103.251 ; 133.733,106.299 144.145,106.299 167.761,106.299 189.599,106.299 206.104,106.299 220.579,106.299 232.514,106.299 ; 133.733,109.347 144.145,109.347 167.761,109.347 189.599,109.347 206.104,109.347 220.579,109.347 232.514,109.347 ; 133.733,112.395 144.145,112.395 167.761,112.395 189.599,112.395 206.104,112.395 220.579,112.395 232.514,112.395 ; 133.733,115.443 144.145,115.443 167.761,115.443 189.599,115.443 206.104,115.443 220.579,115.443 232.514,115.443 ; 133.733,118.491 144.145,118.491 167.761,118.491 189.599,118.491 206.104,118.491 220.579,118.491 232.514,118.491 ; 133.733,121.539 144.145,121.539 167.761,121.539 189.599,121.539 206.104,121.539 220.579,121.539 232.514,121.539 ; 133.733,124.587 144.145,124.587 167.761,124.587 189.599,124.587 206.104,124.587 220.579,124.587 232.514,124.587 ; 133.733,127.635 144.145,127.635 167.761,127.635 189.599,127.635 206.104,127.635 220.579,127.635 232.514,127.635 ; 133.733,130.683 144.145,130.683 167.761,130.683 189.599,130.683 206.104,130.683 220.579,130.683 232.514,130.683 ; 133.733,133.731 232.514,133.731 ; 144.145,136.779 144.145,100.203 ; 167.761,136.779 167.761,100.203 ; 189.599,136.779 189.599,100.203 ; 206.104,136.779 206.104,100.203 ; 220.579,136.779 220.579,100.203 ; 144.145,100.203 133.733,100.203 133.733,136.779 232.514,136.779 232.514,100.203 220.579,100.203 ; 144.145,100.203 167.761,100.203 ; 167.761,100.203 189.599,100.203 ; 189.599,100.203 206.104,100.203 ; 206.104,100.203 220.579,100.203
  text "Notes: unless otherwise specified" at 133.655,163.728 h1.52
  text "1. Silkscreen both sides with non-conductive, RoHS compliant ink" at 133.655,159.918 h1.52
  text "not allowed on component pads or vias (color = WHITE)" at 137.465,157.378 h1.52
  text "2. Material: RoHS-compliant FR4, 1 oz copper on all layers" at 133.655,154.838 h1.52
  text "3. Solder mask: RoHS-compliant SMOBC, type LPI (color = BLUE)" at 133.655,152.298 h1.52
  text "4. Finish: ENIG (3u-5u thickness)" at 133.655,149.758 h1.52
  text "5. All hole sizes are after plating" at 133.655,147.218 h1.52
  text "6. Vendor may use tear drops to improve annular rings as long as" at 133.655,144.678 h1.52
  text "DRC rules are followed" at 138.735,142.138 h1.52
  text "7. All finished pads to be 100% electrically tested" at 133.655,139.598 h1.52
  text "Layer" at 135.511,134.493 h1.52
  text "Name" at 145.923,134.493 h1.52
  text "Material" at 169.539,134.493 h1.52
  text "Thickness" at 191.377,134.493 h1.52
  text "Constant" at 207.882,134.493 h1.52
  text "Gerber" at 222.357,134.493 h1.52
  text "Top Overlay" at 145.923,131.445 h1.52
  text "GTO" at 222.357,131.445 h1.52
  text "Top Solder" at 145.923,128.397 h1.52
  text "Solder Resist" at 169.539,128.397 h1.52
  text "0.40mil" at 191.377,128.397 h1.52
  text "3.5" at 207.882,128.397 h1.52
  text "GTS" at 222.357,128.397 h1.52
  text "1" at 135.511,125.349 h1.52
  text "Top Layer" at 145.923,125.349 h1.52
  text "Copper" at 169.539,125.349 h1.52
  text "1.40mil" at 191.377,125.349 h1.52
  text "GTL" at 222.357,125.349 h1.52
  text "Dielectric1" at 145.923,122.301 h1.52
  text "FR-4" at 169.539,122.301 h1.52
  text "8.00mil" at 191.377,122.301 h1.52
  text "4.8" at 207.882,122.301 h1.52
  text "2" at 135.511,119.253 h1.52
  text "Ground" at 145.923,119.253 h1.52
  text "Copper" at 169.539,119.253 h1.52
  text "1.40mil" at 191.377,119.253 h1.52
  text "GP1" at 222.357,119.253 h1.52
  text "Dielectric3" at 145.923,116.205 h1.52
  text "FR-4" at 169.539,116.205 h1.52
  text "40.00mil" at 191.377,116.205 h1.52
  text "4.8" at 207.882,116.205 h1.52
  text "3" at 135.511,113.157 h1.52
  text "Power" at 145.923,113.157 h1.52
  text "Copper" at 169.539,113.157 h1.52
  text "1.40mil" at 191.377,113.157 h1.52
  text "GP2" at 222.357,113.157 h1.52
  text "Dielectric2" at 145.923,110.109 h1.52
  text "FR-4" at 169.539,110.109 h1.52
  text "8.00mil" at 191.377,110.109 h1.52
  text "4.8" at 207.882,110.109 h1.52
  text "4" at 135.511,107.061 h1.52
  text "Bottom Layer" at 145.923,107.061 h1.52
  text "Copper" at 169.539,107.061 h1.52
  text "1.40mil" at 191.377,107.061 h1.52
  text "GBL" at 222.357,107.061 h1.52
  text "Bottom Solder" at 145.923,104.013 h1.52
  text "Solder Resist" at 169.539,104.013 h1.52
  text "0.40mil" at 191.377,104.013 h1.52
  text "3.5" at 207.882,104.013 h1.52
  text "GBS" at 222.357,104.013 h1.52
  text "Bottom Overlay" at 145.923,100.965 h1.52
  text "GBO" at 222.357,100.965 h1.52
  text "Total board thickness:" at 135.511,97.917 h1.52
  text "62.40mil" at 191.377,97.917 h1.52

## Dimensions
44.221,78.994 to 114.833,79.019 on Mechanical 10
50.596,72.644 to 50.546,197.866 on Mechanical 10

## Text inside footprints (layer, text, board x,y; h text height)
J1: Mechanical 1 "PCB Edge" at 73.343,72.969 h0.25
J2: Mechanical 1 "PCB Edge" at 73.977,197.541 h0.25 r180
P2: Top Overlay "2" at 75.057,171.958 h2; Top Overlay "1" at 75.057,169.418 h2; Top Overlay "14" at 95.377,171.958 h2; Top Overlay "13" at 95.377,169.418 h2
P3: Top Overlay "2" at 97.028,119.634 h2 r180; Top Overlay "1" at 97.028,122.174 h2 r180; Top Overlay "33" at 51.562,122.174 h2 r180
P4: Top Overlay "1" at 107.696,168.148 h2 r270; Top Overlay "2" at 110.236,168.148 h2 r270